# Altium PCB Booster_Channel_RF_HL.PcbDoc (part 3 of 3)
Units mm, origin at the board's own origin, x right, y up, seen from the top; angles counter-clockwise.
Board outline 159 x 28.5 mm, 2 copper layers (Top Layer, Bottom Layer), stack 1.063 mm thick; 161 components, 99 nets, 420 pads, 478 vias.
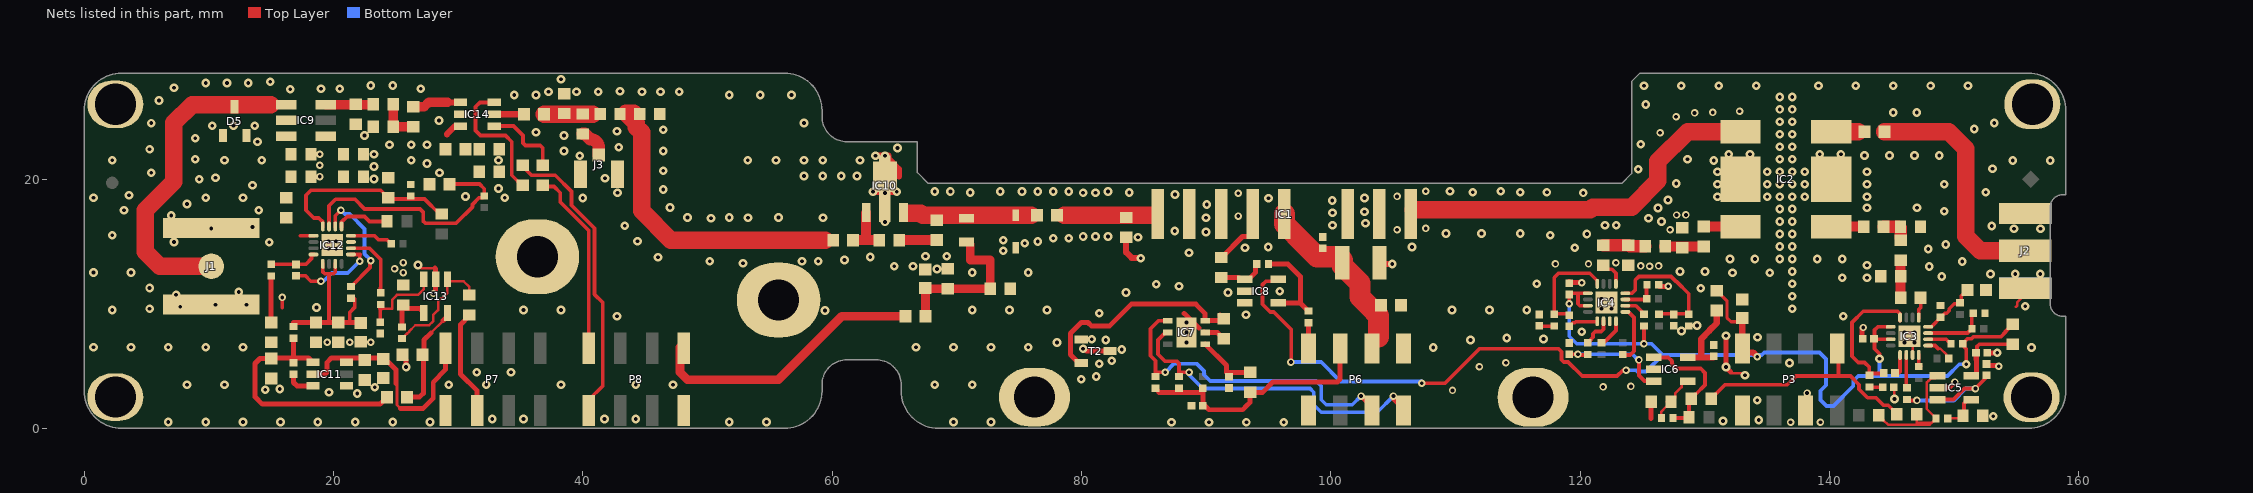
[diagram p2: the nets of this part, all layers, seen from the top]

## Via types
v1: diameter 0.7, hole 0.3, Top Layer to Bottom Layer, tented both sides, 400 vias
v2: diameter 0.6, hole 0.3, Top Layer to Bottom Layer, tented both sides, 78 vias

## Nets (pads, with @x,y where several pads share a name; then routed paths per layer and width w, separated by ;. In a path a pad name is that pad's centre, name@x,y a point inside that pad or via, vN(x,y) a via of type N, cw(c..) or ccw(c..) an arc to the next point about the centre after c; other vN are vias at no path point) (continued)
GND: C5.1 C6.1 C7.1 C8.1 C13.1 C14.1 C17.1 C18.1 C20.2 C21.1 C23.2 C24.1 C25.1 C26.1 C27.1 C29.1 C30.1 C35.1 C45.1 C46.1 C47.1 C51.2 C52.1 C53.1 C54.1 C55.1 C56.2 C57.1 C58.1 C59.1 C60.2 D1.2 D5.1 D5.2 IC1.2 IC1.3 IC1.7 IC1.8 IC2.2 IC2.3 IC2.6 IC2.7 IC3.11 IC3.17 IC4.11 IC4.17 IC5.2 IC6.2 IC7.2 IC7.7 IC8.2 IC8.3 IC9.2 IC10.2 IC10.4 IC11.1 IC12.11 IC12.17 IC13.2 IC14.2 J1.2 J2.2 J3.2 P3.3 P3.7 P6.7 P7.7 P8.1 pad.0 pad.1 pad.2 pad.4 pad.5 pad.6 R1.1 R9.1 R13.1 R14.1 R15.1 R16.1 R21.1 R28.2 R31.1 R32.1 R40.2 R45.1 R46.1 R48.2 R49.2 R52.1 R53.1 R54.1 R56.2 R58.1 R59.1 R65.2 R68.1 R73.2 T2.1 T2.3 | length 36
  Top Layer w0.203: 27.017,12.852 28.126,12.852 28.128,12.85 ; 132.086,4.514 132.185,4.416 133.072,4.416 v1(133.228,4.26) ; v1(145.228,2.358) C20.2@145.228,3.29 ; IC3.11@146.678,5.94 IC3.17@146.678,7.14 ; 154.978,9.74 155.073,9.835 155.073,10.093 J2.2@155.728,10.747
  Top Layer w0.3: 15.878,9.7 v2(15.878,10.5)
  Top Layer w0.4: v1(25.808,4.911) C57.1@25.808,5.476 ; v2@28.126,11 28.178,11.052 28.178,12.8 28.128,12.85 ; v1(80.128,6.39) 80.209,6.39 80.409,6.19 T2.3@82.278,6.19 ; 88.241,9.228 89.407,8.063 ; IC7.2@89.828,7.715 89.853,7.69 IC7.2@89.928,7.69 90.903,7.69 91.403,7.19 C35.1@91.428,7.19 ; C17.1@119.128,11.79 119.228,11.69 v2(120.128,11.69) ; 125.708,0.795 R32.1@125.708,2.245 ; R9.1@126.259,11.52 126.389,11.39 v2(127.068,11.39) ; v1@131.728,7.46 v1(131.703,7.435) v1(131.703,4.922) 131.703,4.898 132.086,4.514 ; C14.1@142.628,7.19 142.628,7.99 v2(142.728,8.09) ; IC3.17@146.428,7.39 IC3.17@146.678,7.14 ; IC5.2@148.828,3.26 149.622,3.26 150.078,3.716 v2(150.075,3.716) ; C26.1@152.617,5.16 152.727,5.05 153.473,5.05 153.538,4.985 v2(153.588,4.985) ; C21.1@152.719,6.06 153.459,6.06 v1(153.469,6.07)
  Top Layer w0.5: v1(63.275,18.974) IC10.2@64.228,18.974 ; v1(63.478,21.879) v1(64.228,21.879) ; v1(64.228,18.879) IC10.2@64.228,18.974 ; IC10.4@64.503,21.879 IC10.4@64.503,21.647 ; v1(65.181,18.974) IC10.2@64.228,18.974 ; R1.1@83.574,15.326 83.574,14.126 84.026,13.674 84.71,13.674 v1(84.748,13.636) ; C7.1@103.915,13.29 104.015,13.19 v1(104.937,13.19) ; IC10.4@64.503,21.647 65.353,20.797 65.353,20.217 64.503,21.067 IC10.4@64.503,21.647
  other v1: 87.228,0.49 90.228,0.49 93.228,0.49 96.228,0.49 6.728,0.5 9.728,0.5 12.728,0.5 15.728,0.5 18.728,0.5 21.728,0.5 24.728,0.5 27.728,0.5 51.728,0.5 54.728,0.5 69.728,0.5 72.728,0.5 131.473,0.588 134.336,0.665 32.728,0.75 35.228,0.75 41.728,0.75 44.228,0.75 153.148,0.976 134.227,2.248 21.895,2.8 19.617,2.9 14.516,3.1 15.66,3.16 23.299,3.29 8.228,3.5 11.228,3.5 29.228,3.5 32.228,3.5 38.228,3.5 44.228,3.5 47.228,3.5 68.228,3.5 71.228,3.5 79.982,3.944 81.182,4.16 31.478,4.5 34.228,4.5 81.428,5.19 136.806,5.247 82.419,5.427 83.228,6.32 108.228,6.49 156.228,6.49 0.728,6.5 3.728,6.5 6.728,6.5 9.728,6.5 12.728,6.5 66.728,6.5 69.728,6.5 72.728,6.5 75.728,6.5 78.028,6.89 88.428,6.89 146.028,6.89 146.828,6.89 81.946,7.09 111.217,7.09 80.828,7.14 117.069,7.168 114.128,7.244 134.235,7.301 88.428,7.69 146.028,7.69 146.828,7.69 120.128,7.752 128.143,7.813 129.383,8.241 88.428,8.49 42.728,9 141.128,8.99 93.203,9.113 81.428,9.238 59.423,9.459 2.228,9.5 35.228,9.5 38.228,9.5 71.228,9.5 74.228,9.5 77.228,9.5 109.728,9.49 112.728,9.49 115.728,9.49 5.228,9.6 121.728,9.59 122.528,9.59 137.028,9.59 18.617,9.7 7.683,9.75 155.728,9.794 10.513,9.92 13.002,9.92 121.728,10.39 122.528,10.39 137.028,10.59 7.354,10.726 83.574,10.897 91.746,10.897 12.378,10.946 95.903,11.007 129.678,11.24 5.228,11.25 87.828,11.394 86,11.555 116.528,11.59 137.028,11.59 141.028,12.09 143.028,12.09 149.028,12.19 152.928,12.39 154.928,12.39 156.928,12.39 0.728,12.5 3.728,12.5 71.228,12.5 75.728,12.5 132.228,12.49 135.228,12.49 128.028,12.59 130.028,12.59 137.028,12.59 68.408,12.778 148.028,12.99 64.978,13 66.478,13 143.028,13.09 26.769,13.1 52.843,13.254 150.674,13.384 50.169,13.4 57.578,13.4 58.874,13.4 60.978,13.5 132.028,13.59 134.028,13.59 136.028,13.59 137.028,13.59 139.028,13.59 141.028,13.59 46.023,13.718 63.049,13.746 67.478,13.8 69.178,13.8 88.628,14.093 73.728,14.25 147.928,14.39 93.115,14.489 119.569,14.49 94.975,14.544 106.511,14.544 136.028,14.59 137.028,14.59 149.338,14.748 75.453,14.839 14.826,14.94 7.178,14.95 76.478,14.995 44.369,15 73.728,15.1 77.728,15.25 78.978,15.25 84.528,15.34 80.128,15.39 81.128,15.39 82.128,15.39 2.228,15.5 117.618,15.498 120.548,15.59 136.028,15.59 137.028,15.59 109.253,15.636 112.099,15.636 115.197,15.636 89.98,15.744 87.48,15.837 154.81,16.015 156.946,16.015 10.178,16.03 13.478,16.15 153.027,16.237 43.346,16.248 100.138,16.283 121.998,16.288 122.908,16.288 102.789,16.448 64.228,16.564 126.528,16.59 136.028,16.59 137.028,16.59 125.491,16.853 50.278,16.863 53.232,16.902 59.264,16.902 89.98,16.898 48.378,16.912 51.728,16.912 55.678,16.907 6.959,17.081 100.138,17.288 102.698,17.383 149.227,17.415 3.178,17.5 13.978,17.5 136.028,17.59 137.028,17.59 126.259,17.676 143.028,17.69 147.028,17.69 46.987,17.71 90.056,17.953 8.228,17.991 100.11,18.283 127.057,18.324 39.978,18.478 95.005,18.462 0.728,18.5 9.728,18.5 12.728,18.5 33.728,18.5 102.698,18.482 30.578,18.6 131.028,18.59 135.028,18.59 136.028,18.59 137.028,18.59 138.028,18.59 143.028,18.59 3.578,18.7 87.498,18.762 42.768,18.909 80.128,18.9 81.128,18.9 120.257,18.89 71.078,18.915 83.828,18.915 152.547,18.932 111.399,18.949 115.197,18.949 117.339,18.949 68.228,19 69.478,19 73.478,19 75.228,19 76.478,19 77.728,19 78.978,19 82.128,19 109.566,19.02 113.628,19.02 46.431,19.162 33.228,19.25 13.478,19.5 131.028,19.59 135.028,19.59 136.028,19.59 137.028,19.59 138.028,19.59 143.028,19.59 149.227,19.59 127.728,19.65 9.202,19.99 23.228,20 41.763,20.065 10.513,20.1 57.728,20.25 59.228,20.25 60.728,20.25 61.978,20.25 5.366,20.5 28.478,20.5 131.028,20.59 135.028,20.59 136.028,20.59 137.028,20.59 138.028,20.59 143.028,20.59 46.431,20.672 124.678,20.788 153.085,20.821 23.228,21 27.478,21.25 2.228,21.5 11.228,21.5 14.228,21.5 26.228,21.5 33.228,21.5 53.228,21.5 55.478,21.5 57.728,21.5 59.228,21.5 62.228,21.5 130.728,21.49 154.728,21.49 157.728,21.49 8.893,21.58 128.628,21.59 136.028,21.59 137.028,21.59 39.745,21.874 142.828,21.89 144.828,21.89 146.828,21.89 148.828,21.89 23.228,22 131.928,21.99 133.628,21.99 139.228,21.99 140.928,21.99 38.478,22.25 46.431,22.245 5.228,22.4 65.228,22.5 42.869,22.55 136.028,22.59 137.028,22.59 24.478,22.75 26.228,22.75 27.478,22.75 124.861,22.788 13.891,23 8.893,23.28 22.478,23.5 38.478,23.5 136.028,23.59 137.028,23.59 36.228,23.75 42.728,23.839 46.431,23.961 151.628,24.02 10.264,24.285 11.964,24.285 13.664,24.285 5.366,24.488 153.228,24.49 57.728,24.5 136.028,24.59 137.028,24.59 28.444,24.7 145.123,25.342 147.01,25.342 136.028,25.59 137.028,25.59 125.278,25.986 5.985,26.3 136.028,26.59 137.028,26.59 34.478,26.75 36.228,26.75 51.728,26.75 54.228,26.75 56.728,26.75 37.228,27 39.478,27 41.228,27 44.728,27 46.228,27 47.728,27 42.978,27.038 16.504,27.207 18.978,27.25 20.478,27.25 26.978,27.25 7.193,27.333 125.128,27.49 128.128,27.49 131.128,27.49 134.128,27.49 139.128,27.49 142.128,27.49 145.128,27.49 148.128,27.49 151.128,27.49 22.978,27.5 24.728,27.5 9.742,27.715 11.442,27.715 13.142,27.715 14.907,27.798 38.228,28
  other v2: 136.89,0.49 139.288,0.49 138.218,2.83 109.766,3.04 121.848,3.32 124.082,3.36 111.923,4.941 114.055,5.259 19.478,6.9 21.278,6.9 22.978,6.9 28.005,10.817 25.578,12.5 24.878,12.8 125.578,13.014 124.878,13.03 126.298,13.03 118.028,13.19 120.678,13.19 122.878,13.29 25.578,13.3 19.578,14.4 20.178,14.4 19.578,15 20.178,15 105.316,15.934 127.222,15.934 107.609,16.034 92.567,17.029 127.742,17.115 128.496,17.119 105.316,18.606 92.567,18.864 107.609,19.012 18.878,20.2 18.878,21.1 18.878,22 126.422,23.719 127.703,24.993 129.186,25.302 130.654,25.342 132.796,25.434
NetC10_1: C10.1 R10.2 R14.2 | length 2
  Top Layer w1: C10.1@144.361,16.19 R14.2@145.528,16.19 ; R10.2@145.728,15.29 R14.2@145.728,16.09
NetC10_2: C10.2 IC2.4 | length 2.3
  Top Layer w0.8: IC2.4@140.218,16.18 140.218,16.19 C10.2@142.509,16.19
NetC11_1: C11.1 R11.1 R15.2 | length 3.2
  Top Layer w0.8: R11.1@126.728,14.59 128.028,14.59 C11.1@129.928,14.59
NetC11_2: C11.2 IC2.5 | length 3
  Top Layer w0.8: C11.2@129.928,16.19 132.928,16.19 IC2.5@132.928,16.18
NetC12_1: C12.1 J2.1 | length 19.4
  Top Layer w1.4: C12.1@144.428,23.79 149.575,23.79 150.943,22.422 150.943,15.4 152.103,14.24 J2.1@155.728,14.24
NetC12_2: C12.2 IC2.1 | length 2.2
  Top Layer w1.4: IC2.1@140.153,23.808 140.171,23.79 142.328,23.79
NetC15_1: C15.1 IC3.1 | length 1.7
  Top Layer w0.3: IC3.1@147.178,8.84 147.178,9.54 147.328,9.69 C15.1@147.328,10.49
NetC15_2: C15.2 R10.1 R13.2 | length 3
  Top Layer w0.8: C15.2@145.728,10.49 R13.2@145.728,12.19 R10.1@145.728,13.49
NetC16_1: C16.1 IC4.1 | length 2.2
  Top Layer w0.3: C16.1@121.878,13.09 122.203,12.765 122.553,12.765 122.878,12.44 IC4.1@122.878,11.54
NetC16_2: C16.2 R11.2 R16.2 | length 3.4
  Top Layer w1: C16.2@121.878,14.69 R16.2@123.878,14.69 123.978,14.59 R11.2@125.228,14.59
NetC19_1: C19.1 IC3.9 | length 1.6
  Top Layer w0.3: C19.1@145.528,4.39 145.678,4.54 IC3.9@145.678,5.94
NetC19_2: C19.2 IC3.4 R26.1 | length 10.9
  Top Layer w0.3: C19.2@144.328,4.39 143.196,4.39 143.196,4.922 142.828,5.29 142.328,5.29 141.828,5.79 141.828,8.49 142.728,9.39 145.478,9.39 145.678,9.19 145.678,8.84 IC3.4@145.678,8.64
NetC20_1: C20.1 R26.2 | length 0.8
  Top Layer w0.3: R26.2@143.428,3.29 C20.1@144.228,3.29
NetC21_2: C21.2 IC5.5 L1.1 | length 7.7
  Top Layer w0.3: IC5.5@151.378,4.21 IC5.5@151.698,4.21 ; IC5.5@151.628,4.14 IC5.5@151.698,4.21 ; C21.2@151.728,5.99 151.728,5.521 151.778,5.471 151.778,5.227 ; L1.1@154.732,6.75 154.722,6.74 152.029,6.74 151.853,6.564 151.853,5.99 151.853,5.521 151.853,5.227 ; IC5.5@151.698,4.21 151.703,4.21 151.853,4.36 151.853,5.227 ; IC5.5@151.698,4.21 151.778,4.29 151.778,5.227 ; 151.778,5.227 151.853,5.227
NetC22_1: C22.1 IC4.9 | length 2.4
  Top Layer w0.3: C22.1@119.134,8.18 119.421,8.468 119.569,8.468 119.65,8.549 IC4.9@121.378,8.549
NetC22_2: C22.2 IC4.4 R27.1 | length 8.2
  Top Layer w0.3: C22.2@119.128,9.19 117.928,9.19 117.928,12.09 118.278,12.44 120.778,12.44 121.378,11.84 IC4.4@121.378,11.54
NetC23_1: C23.1 R27.2 | length 1.2
  Top Layer w0.3: C23.1@116.728,8.19 R27.2@117.928,8.19
NetC24_2: C24.2 IC6.5 L4.1 | length 6.5
  Top Layer w0.5: IC6.5@128.478,5.69 129.728,5.69 ; C24.2@130.728,5.74 130.678,5.69 129.728,5.69 ; L4.1@130.974,9.43 130.974,8.446 130.378,7.85 130.378,7.818 129.728,7.168 129.728,5.69
NetC25_2: C25.2 IC4.16 R24.2 R28.1 | length 10.8
  Top Layer w0.3: IC4.16@123.578,10.84 124.178,10.84 124.428,11.09 124.428,11.89 124.728,12.19 127.297,12.19 127.697,11.79 127.728,11.79 128.728,10.79 128.728,9.19 127.528,9.19 R24.2@126.328,9.19
NetC26_2: C26.2 IC5.3 R29.1 | length 10.8
  Top Layer w0.3: R29.1@146.228,2.29 146.278,2.24 v2(147.028,2.24) ; IC5.3@148.678,2.31 149.96,2.31 150.84,3.19 v2(151.728,3.19) 151.728,3.207 152.617,4.097 C26.2@152.617,4.26
  Bottom Layer w0.3: v2(147.028,2.24) 149.993,2.24 150.943,3.19 v2(151.728,3.19)
NetC27_2: C27.2 IC6.3 R30.1 | length 9.4
  Top Layer w0.3: C27.2@119.128,5.94 v2(119.828,5.94) ; v2@119.828,5.89 R30.1@120.628,5.89 ; v2(124.728,5.49) 124.728,4.24 125.178,3.79 IC6.3@126.078,3.79
  Bottom Layer w0.3: v2(119.828,5.94) 124.197,5.94 124.647,5.49 v2(124.728,5.49)
NetC29_2: C29.2 IC7.1 R33.1 | length 4.9
  Top Layer w0.4: IC7.1@89.928,6.75 91.628,5.05 91.628,4.49 R33.1@93.528,4.49
NetC30_2: C30.2 IC3.16 R20.2 R40.1 | length 4.9
  Top Layer w0.3: IC3.16@147.878,8.14 IC3.16@147.928,8.14 148.178,8.14 R40.1@149.028,8.99 ; R40.1@148.928,8.99 R40.1@149.028,8.99 ; R20.2@150.428,10.079 150.428,9.99 150.028,9.99 149.631,9.593 149.631,9.444 149.424,9.237 149.275,9.237 R40.1@149.028,8.99 ; R20.2@150.478,10.079 150.576,10.177 150.576,10.597 C30.2@151.078,11.1
NetC34_1: C34.1 R47.2 R49.1 | length 3.4
  Top Layer w0.76: R47.2@24.778,26 R49.1@24.778,24.2 C34.1@26.378,24.2
NetC34_2: C34.2 IC14.1 | length 3.7
  Top Layer w0.5: 29.128,26.15 IC14.1@30.178,26.15
  Top Layer w0.76: C34.2@26.649,25.8 27.267,25.8 27.617,26.15 29.128,26.15
NetC35_2: C35.2 IC7.3 T2.2 | length 17.8
  Top Layer w0.4: T2.2@79.978,5.24 79.778,5.24 79.101,5.917 79.101,7.611 79.982,8.492 80.515,8.492 80.808,8.2 82.232,8.2 83.993,9.961 89.169,9.961 89.9,9.231 89.9,8.665 91.303,8.665 C35.2@91.428,8.79 91.403,8.79 91.128,9.065 C35.2@91.128,9.09 ; IC7.3@89.928,8.64 IC7.3@89.953,8.665
NetC38_1: C38.1 IC1.1 R1.2 | length 6.9
  Top Layer w1.4: 78.612,17.085 85.528,17.085
NetC38_2: C38.2 C44.2 D1.1 IC10.3 L5.2 | length 9.8
  Top Layer w1.4: 66.241,17.264 67.084,17.264 67.263,17.085 70.778,17.085 75.453,17.085 C38.2@75.984,17.085
NetC39_1: C39.1 IC14.5 | length 2.5
  Top Layer w0.3: C39.1@35.228,25.15 C39.1@35.278,25.2
  Top Layer w0.5: IC14.5@32.878,25.2 C39.1@35.278,25.2
NetC39_2: C39.2 R8.1 R45.2 R50.2 | length 3.9
  Top Layer w1.4: C39.2@36.878,25.2 40.77,25.2
NetC42_1: C42.1 R52.2 R56.1
NetC42_2: C42.2 IC14.3 | length 1.4
  Top Layer w0.5: 29.078,23.6 29.728,24.25 IC14.3@30.178,24.25
NetC44_1: C44.1 R55.2 | length 3
  Top Layer w0.8: R55.2@65.378,15.1 C44.1@68.378,15.1
NetC45_2: C45.2 C46.2 C47.2 L5.1 L11.1 | length 12.6
  Top Layer w0.7: L11.1@67.488,8.996 67.478,9.006 67.478,11.2 C46.2@69.278,11.2 C45.2@72.678,11.2 72.678,13.5 71.078,13.5 L5.1@71.078,14.75
NetC48_1: C48.1 IC12.1 | length 1.1
  Top Layer w0.3: 17.328,15.45 IC12.1@18.428,15.45
NetC48_2: C48.2 IC9.1 R58.2 R59.2
NetC49_1: C49.1 R8.2 R46.2 | length 24.7
  Top Layer w1.4: 43.449,25.293 43.466,25.293 ; 44.08,25.293 43.466,25.293 ; 59.452,15.1 47.058,15.1 44.708,17.45 44.708,23.743 44.278,24.173 44.278,24.481 43.466,25.293
NetC49_2: C49.2 IC10.1 R55.1 | length 4.3
  Top Layer w0.8: C49.2@61.678,15.1 62.7,15.1 ; IC10.1@62.728,17.314 62.7,17.286 62.7,15.1 ; R55.1@63.778,15.1 62.7,15.1
NetC56_1: C56.1 IC12.15 R65.1 R66.2 | length 20.1
  Top Layer w0.3: IC12.15@19.628,16.15 IC12.15@19.628,16.2 19.628,17.85 20.153,18.375 21.703,18.375 22.478,17.6 26.932,17.6 27.174,17.358 27.174,16.994 27.174,16.63 27.356,16.448 27.67,16.448 ; 27.72,16.448 29.807,16.448 31.128,17.769 31.128,17.967 31.672,18.51 31.938,18.51 R66.2@32.078,18.65 32.078,19.217 31.694,19.6 R65.1@29.278,19.6
NetC57_2: C57.2 IC13.5 L12.1 | length 8.8
  Top Layer w0.2: 27.819,7.666 28.802,8.65 28.778,8.65
  Top Layer w0.4: L12.1@25.888,2.496 26.873,2.496 27.189,2.813 C57.2@27.189,5.835 ; C57.2@27.177,5.847 27.246,5.916 27.246,7.094 27.819,7.666 ; 28.778,8.65 29.128,9 IC13.5@29.128,9.4
NetC58_2: C58.2 IC12.16 R69.1 R73.1 | length 15
  Top Layer w0.3: IC12.16@19.128,16.15 IC12.16@19.128,16.2 19.128,16.55 18.803,16.875 18.403,16.875 17.778,17.5 17.778,18.7 18.178,19.1 23.778,19.1 C58.2@24.378,18.5 ; C58.2@24.378,18.4 27.287,18.4 R69.1@28.514,17.173
NetC59_2: C59.2 IC13.3 R74.1 | length 6.3
  Top Layer w0.2: 23.778,9.6 24.678,9.6 24.678,10.307 25.071,10.7 26.765,10.7 27.228,11.163 IC13.3@27.228,11.8
  Top Layer w0.3: C59.2@23.728,8.5 C59.2@23.728,8.51 23.728,9.55 23.778,9.6
  Top Layer w0.4: 23.771,9.6 23.778,9.6
NetC60_1: C60.1 R75.1 | length 3.4
  Top Layer w0.4: C60.1@14.978,8.5 14.978,11.9
NetC61_1: C61.1 IC12.9 | length 7.3
  Top Layer w0.3: C61.1@16.978,12.25 17.713,12.25 18.163,11.8 v2(18.978,11.8) ; IC12.9@21.328,13.95 22.128,13.95 22.078,13.9 v2(22.078,13.4)
  Bottom Layer w0.3: v2(18.978,11.8) 19.178,11.8 19.847,12.469 21.128,12.469 22.059,13.4 v2(22.078,13.4)
NetC61_2: C61.2 IC12.4 R75.2 | length 4
  Top Layer w0.3: R75.2@14.978,13.17 16.978,13.17 17.766,13.17 18.213,13.617 18.213,13.95 IC12.4@18.378,13.95 IC12.4@18.428,13.95
NetD5_3: D5.3 IC9.3 J1.1 | length 25.5
  Top Layer w1.4: J1.1@10.178,13 6.041,13 4.878,14.163 4.878,17.5 7.178,19.8 7.178,24.503 8.645,25.97 14.952,25.97
NetIC1_4: IC1.4 R5.1 | length 4.9
  Top Layer w0.4: R5.1@91.194,13.707 91.244,13.707 92.922,15.385 93.434,15.385 93.734,15.685 IC1.4@93.734,17.185
NetIC1_9: IC1.9 IC2.8 | length 29.7
  Top Layer w1.4: IC1.9@106.634,17.538 120.818,17.538 121.034,17.754 124.148,17.754 126.252,19.858 126.252,21.419 128.641,23.808 IC2.8@132.867,23.808
NetIC3_10: IC3.10 R29.2 | length 2.7
  Top Layer w0.3: R29.2@146.178,3.29 IC3.10@146.178,5.94 ; R29.2@146.228,3.29 R29.2@146.278,3.34
NetIC3_12: IC3.12 R25.2 | length 1
  Top Layer w0.3: IC3.12@147.178,5.94 147.178,5.14 R25.2@147.328,4.99
NetIC3_13: IC3.13 R38.2 | length 2.2
  Top Layer w0.203: 148.719,6.399 148.901,6.399 149.389,5.911 149.389,5.788 R38.2@149.577,5.6
  Top Layer w0.3: IC3.13@147.878,6.64 148.478,6.64 148.719,6.399
NetIC3_14: IC3.14 R18.2 | length 1.7
  Top Layer w0.3: IC3.14@147.878,7.14 149.378,7.14 R18.2@149.528,6.99
NetIC3_15: IC3.15 R7.1 R21.2 | length 4.8
  Top Layer w0.3: IC3.15@147.878,7.64 151.078,7.64 151.428,7.99 151.428,9.05 R21.2@151.468,9.09
NetIC4_10: IC4.10 R30.2 | length 2.6
  Top Layer w0.3: R30.2@120.628,6.89 120.678,6.89 120.788,7 120.788,7.05 121.038,7.3 121.038,7.589 121.214,7.765 121.702,7.765 121.878,7.941 IC4.10@121.878,8.64
NetIC4_12: IC4.12 R37.2 | length 2.2
  Top Layer w0.3: R37.2@121.828,6.89 121.928,6.89 122.878,7.84 IC4.12@122.878,8.64
NetIC4_13: IC4.13 R39.2 | length 4.7
  Top Layer w0.3: R39.2@123.428,5.89 124.028,5.89 124.328,6.19 124.328,8.89 123.878,9.34 IC4.13@123.578,9.34
NetIC4_14: IC4.14 R19.1 | length 1.8
  Top Layer w0.3: IC4.14@123.578,9.84 124.478,9.84 R19.1@125.128,9.19
NetIC4_15: IC4.15 R2.1 R9.2 | length 2.8
  Top Layer w0.3: IC4.15@123.578,10.34 125.278,10.34 125.328,10.39 125.328,11.35 R9.2@125.368,11.39
NetIC5_1: IC5.1 R22.1 R41.2 R42.2 | length 12.5
  Top Layer w0.203: R42.2@143.963,1.042 143.963,0.992 144.311,0.644 144.361,0.644 144.715,0.29 148.058,0.29 148.2,0.432 ; R41.2@147.011,1.118 147.011,0.432 148.2,0.432 ; IC5.1@148.828,4.21 IC5.1@148.678,4.21 148.353,4.21 IC5.1@148.155,4.012 ; IC5.1@149.078,4.14 148.608,4.14 148.48,4.012 IC5.1@148.155,4.012 ; IC5.1@148.155,4.012 147.957,3.814 147.948,3.814 147.799,3.665 147.799,1.569 148.558,0.81 R22.1@148.558,0.79 148.558,0.77 148.37,0.582 148.35,0.582 148.2,0.432
NetIC5_4: IC5.4 R22.2 R31.2 | length 3.3
  Top Layer w0.203: R22.2@149.498,0.79 150.518,0.79 R31.2@150.719,0.991
  Top Layer w0.3: R31.2@150.807,0.991 150.807,1.984 150.903,2.08 150.903,2.16 150.983,2.24 IC5.4@151.628,2.24
NetIC6_1: IC6.1 R12.1 R17.1 R23.1 | length 10.5
  Top Layer w0.3: IC6.1@126.078,5.69 127.078,5.69 127.378,5.39 127.378,5.154 127.742,4.79 129.678,4.79 130.028,4.44 130.028,3.48 129.278,2.73 129.228,2.73 128.928,2.43 R12.1@128.928,2.38 128.75,2.202 R17.1@128.75,1.134 ; R23.1@127.464,0.822 128.684,0.822 R17.1@128.75,0.888 R17.1@128.75,1.134 ; R17.1@128.506,0.891 R17.1@128.75,1.134 ; R17.1@128.806,1.241 128.806,1.191 R17.1@128.75,1.134
NetIC6_4: IC6.4 R23.2 R32.2 | length 4.1
  Top Layer w0.203: R23.2@126.524,0.822 126.524,1.344 126.91,1.73 126.96,1.73 127.308,2.078 R32.2@127.308,2.128 127.625,2.444 127.625,2.787 128.153,3.315 128.153,3.592 128.352,3.79 IC6.4@128.628,3.79
  Top Layer w0.3: R32.2@127.008,2.128 R32.2@127.058,2.178
NetIC8_1: IC8.1 R4.2 R5.2 | length 3.8
  Top Layer w0.4: R5.2@91.194,12.107 92.609,12.107 92.759,11.957 IC8.1@93.084,11.957 93.409,11.957 93.968,12.516 93.968,13.1 R4.2@94.058,13.19
NetIC8_4: IC8.4 R4.1 R51.2 | length 8.1
  Top Layer w0.4: R4.1@94.908,13.1 R4.1@94.998,13.19 96.553,13.19 97.559,12.184 97.559,10.057 ; IC8.4@95.691,10.151 IC8.4@95.784,10.057 97.559,10.057 ; R51.2@98.218,9.418 98.198,9.418 97.559,10.057
NetIC9_4: IC9.4 R47.1 R48.1 | length 3.8
  Top Layer w0.76: IC9.4@19.368,25.97 23.148,25.97 R47.1@23.178,26
NetIC9_6: IC9.6 R53.2 R54.2
NetIC11_6: IC11.6 R62.1 | length 2.4
  Top Layer w0.4: R62.1@16.778,4.33 16.778,3.681 17.061,3.398 IC11.6@18.328,3.398 IC11.6@18.378,3.398
NetIC12_10: IC12.10 R74.2 | length 5.2
  Top Layer w0.3: IC12.10@21.328,14.45 22.88,14.45 23.78,13.55 23.78,11.202 23.778,11.2 23.728,11.25
NetIC12_12: IC12.12 R71.2 | length 3.5
  Top Layer w0.3: IC12.12@21.328,15.45 IC12.12@21.378,15.45 23.272,15.45 23.596,15.126 24.283,15.126 R71.2@24.578,14.831
NetIC12_13: IC12.13 R72.1 | length 4.4
  Top Layer w0.3: IC12.13@20.628,16.15 20.628,16.55 21.078,17 22.478,17 22.878,16.6 R72.1@24.278,16.6
NetIC12_14: IC12.14 R64.2 | length 9.6
  Top Layer w0.3: IC12.14@20.128,16.15 20.128,17.05 v2(20.578,17.5) ; R64.2@21.378,11.4 21.428,11.4 22.92,12.892 22.92,13.378 v2(22.977,13.435)
  Bottom Layer w0.3: v2(20.578,17.5) 20.878,17.2 21.278,17.2 22.478,16 22.478,13.997 22.977,13.497 v2(22.977,13.435)
NetIC13_1: IC13.1 R67.1 R70.1 | length 9.4
  Top Layer w0.2: R67.1@25.478,7.2 25.872,7.594 25.892,7.594 26.04,7.742 26.04,7.762 26.544,8.266 27.66,8.266 27.978,8.584 27.978,9.09 28.378,9.49 28.378,10.216 28.612,10.45 28.719,10.45 29.128,10.858 29.128,11.8 30.423,11.8 30.878,11.345 R70.1@30.878,10.7
NetIC13_4: IC13.4 R67.2 R68.2 | length 3
  Top Layer w0.4: 25.478,8.5 25.478,9.5 25.578,9.6 26.928,9.6 IC13.4@27.278,9.25
NetIC14_4: IC14.4 R44.1 | length 6
  Top Layer w0.3: IC14.4@32.878,24.25 34.428,24.25 35.178,23.5 35.178,22.9 35.378,22.7 36.578,22.7 36.778,22.5 R44.1@36.778,21.5
NetIC14_6: IC14.6 R43.1 | length 10.4
  Top Layer w0.3: IC14.6@32.478,26.15 31.728,26.15 31.378,25.8 31.378,23.9 31.778,23.5 33.778,23.5 34.278,23 34.278,20.3 R43.1@35.178,19.4
NetJ3_1: J3.1 R50.1 | length 2.2
  Top Layer w1: R50.1@39.978,23.619 40.159,23.619 40.578,23.2 cw(c40.578,22.5) 41.278,22.5 ; J3.1@41.278,21.925 J3.1@41.278,22.3
NetP7_5: P7.5 R70.2 | length 8.4
  Top Layer w0.4: R70.2@30.878,9.1 30.878,9.02 30.178,8.32 30.178,4.348 31.508,3.018 P7.5@31.508,1.5
OUT_BIAS: P6.8 R51.1 | length 2.1
  Top Layer w0.4: P6.8@98.218,6.42 R51.1@98.218,8.478
P3V3: C13.2 P6.6 R33.2 R34.1 R35.1 R36.1 | length 20.1
  Top Layer w0.4: R35.1@85.928,3.19 86.228,2.89 89.728,2.89 89.728,1.99 90.228,1.49 92.928,1.49 93.241,1.803 93.528,2.09 R33.2@93.528,2.89 94.528,2.89 95.365,3.727 100.524,3.727 100.758,3.961 P6.6@100.758,6.42 ; C13.2@89.726,1.803 C13.2@89.776,1.803
P3V3A: C51.1 IC11.4 L12.2 R62.2 R63.1 | length 20
  Top Layer w0.4: 16.778,5.6 16.828,5.65 17.976,5.65 IC11.4@18.328,5.298 ; 16.778,6.9 16.778,5.65 15.028,5.65 C51.1@14.978,5.6 14.078,5.6 13.678,5.2 13.678,2.532 14.271,1.939 23.711,1.939 L12.2@24.268,2.496
P3V3A1: C8.2 C14.2 C17.2 IC3.5 IC3.7 IC4.5 IC4.7 IC8.5 L1.2 L4.2 P3.8 R18.1 R19.2 | length 109.8
  Top Layer w0.254: L4.2@130.974,11.05 131.782,10.242 131.782,8.886 132.113,8.555 133.018,8.555 C8.2@133.028,8.565
  Top Layer w0.3: IC8.5@95.784,11.957 95.634,11.807 94.791,11.807 94.528,11.544 94.528,9.961 95.149,9.34 95.43,9.34 96.831,7.94 v2@96.831,5.427 ; v2(107.297,3.62) 109.167,3.62 111.923,6.376 118.275,6.376 118.516,6.136 118.516,5.505 118.693,5.328 119.034,5.328 120.172,4.19 122.975,4.19 123.44,4.655 v2(123.688,4.655) ; v2(119.128,9.99) C17.2@119.128,10.74 119.128,10.79 119.178,10.84 119.828,10.84 ; IC4.7@120.678,9.84 IC4.7@120.628,9.84 119.978,9.84 119.828,9.99 119.828,10.84 ; IC4.5@120.678,10.84 IC4.5@120.628,10.84 119.828,10.84 ; v2(125.128,6.79) R19.2@125.128,8.19 ; v1(144.028,5.59) 144.028,5.99 143.628,6.39 C14.2@143.628,7.19 ; IC3.7@144.978,7.14 IC3.7@144.928,7.14 143.678,7.14 C14.2@143.628,7.19 ; IC3.5@144.978,8.14 IC3.5@144.928,8.14 143.878,8.14 143.628,7.89 C14.2@143.628,7.19 ; R18.1@150.698,6.79 150.698,6.81 151.076,7.188 151.406,7.188 151.555,7.337 153.749,7.337 154.131,7.719 154.131,7.763 L1.2@154.728,8.36 ; R18.1@150.838,6.8 150.838,6.532 150.978,6.392 v1(150.978,5.14)
  Top Layer w0.5: C8.2@133.018,8.555 133.018,6.09 133.878,6.09 v2(134.228,5.74)
  Bottom Layer w0.3: v2(96.798,5.319) 99.229,5.319 100.788,3.76 107.219,3.76 v2@107.258,3.8 ; v2(119.128,9.99) 119.128,7.39 119.728,6.79 v2(125.128,6.79) 125.728,6.79 126.628,5.89 ; v2(123.688,4.655) 124.486,4.655 124.588,4.553 125.291,4.553 126.628,5.89 ; v1(144.028,5.59) 144.028,4.19 ; v1(150.978,5.14) 150.428,5.14 149.478,4.19 144.028,4.19 ; 126.628,5.89 134.228,5.89 134.576,5.89 134.776,6.09 139.203,6.09 139.728,5.566 139.728,3.449 139.288,3.009 139.288,2.269 139.767,1.79 140.328,1.79 141.928,3.39 141.928,3.79 142.328,4.19 144.028,4.19
P3V3ADL: C53.2 C54.2 C55.2 IC12.5 IC12.7 R63.2 R64.1 | length 13.9
  Top Layer w0.3: IC12.5@19.128,13.25 19.128,12.55 19.278,12.4 19.628,12.4 ; 19.678,8.5 19.628,8.55 19.628,12.4 ; IC12.7@20.128,13.25 20.128,12.55 19.978,12.4 19.628,12.4 ; 21.278,8.5 21.278,9.3 21.678,9.7 R64.1@21.678,10.4
  Top Layer w0.4: 16.778,8.5 C53.2@18.578,8.5 19.678,8.5 C54.2@20.378,8.5 21.278,8.5 C55.2@22.178,8.5
RET_VRMS: P3.2 R12.2 R41.1 | length 19.1
  Top Layer w0.3: R12.2@130.528,2.38 130.528,2.43 130.828,2.73 130.878,2.73 131.638,3.49 136.628,3.49 137.328,4.19 140.728,4.19 ; P3.2@140.638,6.09 140.728,6 140.728,4.19 ; R41.1@145.411,1.118 145.411,1.168 144.734,1.845 144.338,1.845 143.736,2.447 143.073,2.447 142.385,3.135 142.385,3.501 141.696,4.19 140.728,4.19
SCK: IC7.4 P6.3 R35.2 | length 25.9
  Top Layer w0.3: v2(86.728,4.49) 85.928,4.49 85.928,5.428 85.528,5.828 85.528,7.99 86.168,8.63 IC7.4@86.928,8.63
  Top Layer w0.4: v2@102.498,2.52 P6.3@103.428,1.59
  Bottom Layer w0.3: v2(86.728,4.49) 87.428,5.19 89.228,5.19 89.828,4.59 89.828,4.29 90.328,3.79 98.828,3.79 99.228,3.39 99.228,2.29 99.628,1.89 101.728,1.89 v2(102.428,2.59)
SDA: IC7.5 P6.1 R34.2 | length 26.3
  Top Layer w0.3: IC7.5@86.928,7.69 86.728,7.69 86.128,7.09 86.128,5.94 86.678,5.39 87.628,5.39 87.828,5.19 87.828,4.49 v2(88.628,4.49)
  Top Layer w0.4: v2(105.028,2.59) 105.038,2.58 105.038,2.38 P6.1@106.028,1.39
  Bottom Layer w0.3: v2(88.628,4.49) 88.628,4.29 89.728,3.19 98.328,3.19 98.628,2.89 98.628,1.89 99.228,1.29 103.728,1.29 v2(105.028,2.59)
SW_RF_A: P8.8 R44.2 | length 15
  Top Layer w0.3: R44.2@36.778,19.4 37.678,19.4 38.178,18.9 38.178,18.154 40.468,15.864 P8.8@40.468,6.5
SW_RF_B: P8.7 R43.2 | length 23.8
  Top Layer w0.3: R43.2@35.178,21.1 35.428,20.85 35.428,20.748 35.876,20.3 37.778,20.3 39.076,19.002 39.076,17.896 40.92,16.051 40.92,10.748 41.578,10.09 41.578,3.4 40.468,2.29 P8.7@40.468,1.5
VCC_PREAMP: L11.2 P8.2 | length 22.4
  Top Layer w0.7: P8.2@47.788,6.5 47.788,4.49 48.378,3.9 55.678,3.9 60.774,8.996 L11.2@65.868,8.996
VCC_PREAMP_1: C18.2 C52.2 IC11.3 IC11.5 P7.8 | length 18.7
  Top Layer w0.203: 24.995,3.581 25.078,3.499 25.078,1.876 25.354,1.6
  Top Layer w0.381: 25.354,1.6 27.178,1.6 27.977,2.399 27.977,3.699 28.968,4.69 P7.8@28.968,6.5
  Top Layer w0.4: IC11.5@18.378,4.348 19.325,4.348 19.478,4.501 19.478,5.3 19.828,5.65 22.478,5.65 23.928,5.65 C18.2@23.978,5.6 ; C18.2@24.003,5.55 C18.2@23.978,5.55 24.253,5.275 24.426,5.275 24.995,4.706 24.995,3.581
VCC_PWRAMP: C5.2 C6.2 C7.2 IC1.5 P6.2 P6.4 | length 14
  Top Layer w1.7: IC1.5@96.274,17.185 96.274,16.385 97.935,14.724 98.892,13.767 99.364,13.767 100.64,13.767 100.915,13.492 C7.2@100.915,13.29 100.915,13.065 102.338,11.642 102.338,10.529 103.509,9.358 103.828,9.039 P6.4@103.828,7.334
pads on no net: FTG1.FTG2 FTG2.1 IC3.2 IC3.3 IC3.6 IC3.8 IC4.2 IC4.3 IC4.6 IC4.8 IC9.5 IC11.2 IC12.2 IC12.3 IC12.6 IC12.8 P7.2 P7.4 P8.3 P8.4 P8.5 P8.6

## Polygon pours and split planes (outlines as drawn)
GND on Bottom Layer "Bottom Layer-GND" (solid, remove dead copper, pour order 9): 79.478,-0.25 155.978,-0.26 ccw(c155.978,2.74) 158.978,2.74 158.978,8.99 158.728,8.99 cw(c158.728,9.99) 157.728,9.99 157.728,16.99 cw(c158.728,16.99) 158.728,17.99 158.978,17.99 158.978,25.74 ccw(c155.978,25.74) 155.978,28.74 124.128,28.75 124.043,20.52 123.342,19.65 67.698,19.65 66.828,20.436 66.828,23.25 61.178,23.25 cw(c61.178,25) 59.428,25 59.428,25.5 ccw(c56.178,25.5) 56.178,28.75 2.978,28.75 ccw(c2.978,25.5) -0.272,25.5 -0.272,3 ccw(c2.978,3) 2.84,-0.247 ccw(c2.878,0.001) 2.878,-0.25 56.178,-0.25 ccw(c56.178,3) 59.428,3 59.428,3.5 cw(c61.178,3.499) 61.178,5.25 63.528,5.25 cw(c63.528,3.5) 65.278,3.5 65.278,3 ccw(c68.528,3) 68.528,-0.25
GND on Top Layer "tg" (solid, remove dead copper, pour order 8): 79.128,0 79.128,-0.1 155.01,-0.1 ccw(c155.978,2.74) 155.978,-0.26 ccw(c155.978,2.74) 158.978,2.74 158.978,8.99 158.728,8.99 cw(c158.728,9.99) 157.728,9.99 157.728,16.99 cw(c158.728,16.99) 158.728,17.99 158.978,17.99 158.978,25.74 ccw(c155.978,25.74) 155.978,28.74 124.128,28.74 124.212,20.52 123.342,19.65 67.698,19.65 66.828,20.436 66.828,23.25 61.178,23.25 cw(c61.178,25) 59.428,25 59.428,25.5 ccw(c55.866,24.949) 56.609,28.476 1.794,28.527 ccw(c2.978,25.5) -0.272,25.5 -0.272,3 ccw(c2.978,3) 2.84,-0.247 ccw(c2.878,0) 2.878,-0.25 ccw(c2.878,-0.001) 3.127,-0.001 57.429,0 ccw(c56.178,3) 59.428,3 59.428,3.5 cw(c61.178,3.499) 61.178,5.25 63.528,5.25 cw(c63.528,3.5) 65.278,3.5 65.278,3 ccw(c68.528,3) 67.277,0

## Other copper
Top Layer:
  rectangle net GND: 11.586,14.44 14.058,17.38
  rectangle net GND: 6.586,14.503 8.466,17.282
  rectangle net GND: 11.946,7.8 14.178,11.56
  rectangle net GND: 5.719,8.51 8.41,11.638
  rectangle net GND: 64.228,18.564 66.478,22
  rectangle net NetC42_1: 30.378,20.1 32.078,22.9
  rectangle net NetC42_2: 28.578,21.9 29.378,23.85
  rectangle net NetC48_1: 15.378,16.5 16.978,17.3
  rectangle net NetC48_2: 15.378,18.1 17.078,23.8
  rectangle net VCC_PWRAMP: 102.828,4.79 104.828,9.877
  rectangle net VCC_PWRAMP: 102.828,4.79 106.428,7.19
  pour cut-out: 157.728,16.49 157.728,17.74 cw(c158.728,17.74) 158.728,18.74 158.978,18.74 158.978,16.49
  pour cut-out: 23.678,10.7 26.378,10.7 27.328,9.75 25.478,7.9 23.247,7.9
  pour cut-out: 23.678,13.8 26.228,13.8 26.503,14.075 25.978,14.6 24.578,14.6
  region net P3V3ADL: 19.628,11.4 20.428,10.6 21.978,10.6 22.578,10 22.578,8.4 18.678,8.4 18.578,8.5 19.628,9.55
  pour cut-out: 33.248,4.95 32.278,4.95 31.478,5.75 32.978,7.25 33.728,7.25
  pour cut-out: 15.978,3.3 15.978,6.3 16.028,6.25 17.628,6.25 17.628,3.24
  pour cut-out: 24.678,6.102 24.678,8.4 25.478,9.2 26.756,7.922 26.756,6.102
  pour cut-out: 14.178,9.2 18.572,9.2 17.578,8.206 17.578,6.2 15.978,6.2 15.978,7.8 14.178,7.8
  pour cut-out: 14.178,14.2 14.178,11.2 16.178,11.2 17.578,12.6 17.578,13.451 16.829,14.2
  pour cut-out: 28.268,5.05 32.178,5.05 29.978,7.25
  pour cut-out: 18.043,22.55 18.043,26.85 20.728,26.85 20.778,26.9 20.778,22.55
  region net VCC_PREAMP: 50.576,8.302 52.378,6.5 57.478,6.5 60.978,10 65.678,10 66.278,9.4 66.278,7 65.278,6 59.978,6 58.478,4.5 58.478,3 56.978,1.5 50.278,1.5 46.978,4.8 46.978,8.295
  region net NetIC9_6: 18.578,23.2 19.278,23.2 19.678,22.8 19.678,19.7 21.378,19.7 21.378,23 20.578,23.8 19.778,23.8
  region net NetC48_1: 17.878,15.6 16.978,16.5 16.978,17.3 15.478,17.285 15.378,15.9 15.978,15.3 17.778,15.3
  pour cut-out: 63.228,16 63.728,15.5 67.478,15.5 67.478,15.75 67.228,16
  pour cut-out: 30.578,26.4 30.578,24.4 30.678,24.3 31.078,24.7 31.078,26.3 30.778,26.6
  pour cut-out: 34.478,18.6 37.478,18.6 37.478,22.3 34.478,22.3
Bottom Layer:
  pour cut-out: 157.728,16.49 157.728,17.74 cw(c158.728,17.74) 158.728,18.74 158.978,18.74 158.978,16.49

## Silkscreen, mask and mechanical layers (free items; w line width, h text height)
Top Overlay:
  lines w0.1: 73.922,8.63 85.528,8.63 ; 73.922,11.954 73.922,29.377 ; 84.528,16.283 85.428,16.283 ; 86.928,16.283 87.828,16.283 ; 89.356,16.283 90.444,16.283 ; 91.828,16.283 92.954,16.283 ; 94.528,16.283 95.634,16.283 ; 95.135,8.658 97.753,8.658 ; 97.033,16.283 100.601,16.283 ; 98.728,8.651 118.626,8.651 ; 102.015,16.283 103.153,16.283 ; 104.582,16.288 105.703,16.283 ; 107.137,16.283 108.567,16.283
  text "Booster HL / Power  / Stage v1.0.3" at 46.645,16.437 h1.27
  text "WUT ISE 2022" at 40.92,12.48 h1
Bottom Overlay:
  rectangle: 118.028,3.984 120.128,7.484
  region: 126.818,3.62 126.818,10.59 118.366,10.59 118.366,3.62
  rectangle: 150.089,6.746 154.689,10.246
  rectangle: 125.737,0 153.112,10.59
  rectangle: 85.428,0.605 108.028,5.62
  rectangle: 27.028,15.3 31.628,18.8
  rectangle: 13.428,11.1 25.128,19.2
Top Solder:
  lines w0.76: 27.442,25.975 27.617,26.15 29.096,26.15
  lines w1.7: 7.178,23 7.178,24.503 8.645,25.97 10.552,25.97 ; 146.028,23.79 149.575,23.79 150.943,22.422 150.943,15.462 152.164,14.24 153.704,14.24 153.724,14.22
  lines w1.8: 5.742,13.299 4.678,14.363 4.678,17.3 7.178,19.8 7.178,23 ; 13.552,26 14.278,26 ; 44.708,23.5 44.708,17.45 47.018,15.14 58.476,15.14 ; 79.638,17.095 84.496,17.069 ; 108.228,17.538 120.818,17.538 121.034,17.754 124.148,17.754 126.252,19.858 126.252,21.419 128.641,23.808 ; 128.928,23.808 130.028,23.808
Bottom Solder:
  rectangle: 83.728,10.84 159.728,29.52
  rectangle: 78.478,-0.38 84.728,29.5
  rectangle: 30.721,-0.5 79.221,29.5
  rectangle: 24.221,10.946 31.221,15.3
  rectangle: -0.779,18.4 32.221,29.5
  rectangle: 23.321,14.939 26.512,18.7
  rectangle: -0.779,0.5 13.221,29.5
  rectangle: 145.728,9.99 159.728,30.24
  rectangle: 154.256,-0.51 159.728,10.49
  rectangle: 108.528,-0.51 117.228,14.49
  rectangle: 116.528,-0.51 125.578,3.79
  rectangle: -0.779,-0.5 79.221,11.1
  region: 84.528,13.581 84.528,6.12 114.128,6.12 114.128,15.19 113.24,16.078
Mechanical 1:
  drawing of 227 lines, arcs and shapes, not listed
  text "Layer" at 16.436,58.474 h1.52
  text "Name" at 26.848,58.474 h1.52
  text "Material" at 50.464,58.474 h1.52
  text "Thickness" at 72.302,58.474 h1.52
  text "Constant" at 88.808,58.474 h1.52
  text "Board Layer Stack" at 103.282,58.474 h1.52
  text "Top Overlay" at 26.848,55.426 h1.52
  text "Top Solder" at 26.848,52.378 h1.52
  text "Solder Resist" at 50.464,52.378 h1.52
  text "3.5" at 88.808,52.378 h1.52
  text "1" at 16.436,49.33 h1.52
  text "Top Layer" at 26.848,49.33 h1.52
  text "0.036mm" at 72.302,49.33 h1.52
  text "Dielectric 1" at 26.848,46.282 h1.52
  text "Core-042" at 50.464,46.282 h1.52
  text "0.991mm" at 72.302,46.282 h1.52
  text "4.6" at 88.808,46.282 h1.52
  text "2" at 16.436,43.234 h1.52
  text "Bottom Layer" at 26.848,43.234 h1.52
  text "0.036mm" at 72.302,43.234 h1.52
  text "Bottom Solder" at 26.848,40.186 h1.52
  text "Solder Resist" at 50.464,40.186 h1.52
  text "3.5" at 88.808,40.186 h1.52
  text "Bottom Overlay" at 26.848,37.138 h1.52